# EAGLE board TickBoard (EAGLE 9.5.2)
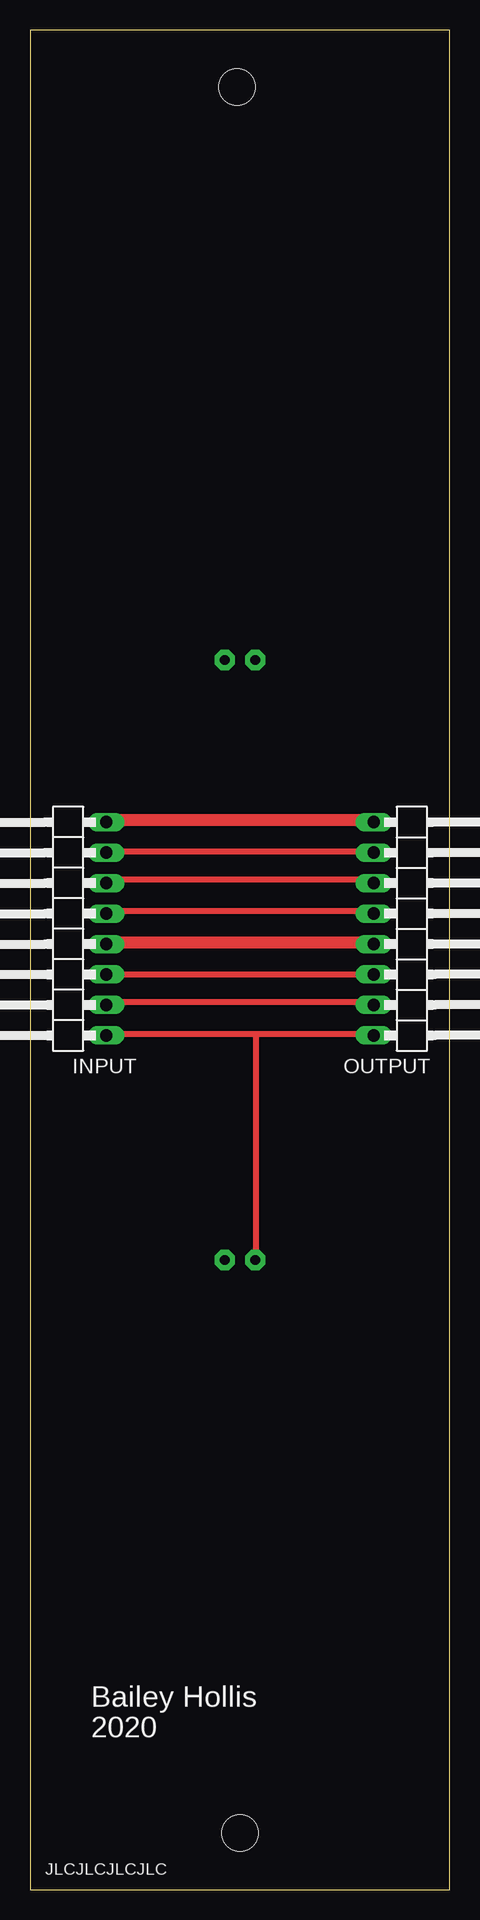
[diagram p0: board, top side]
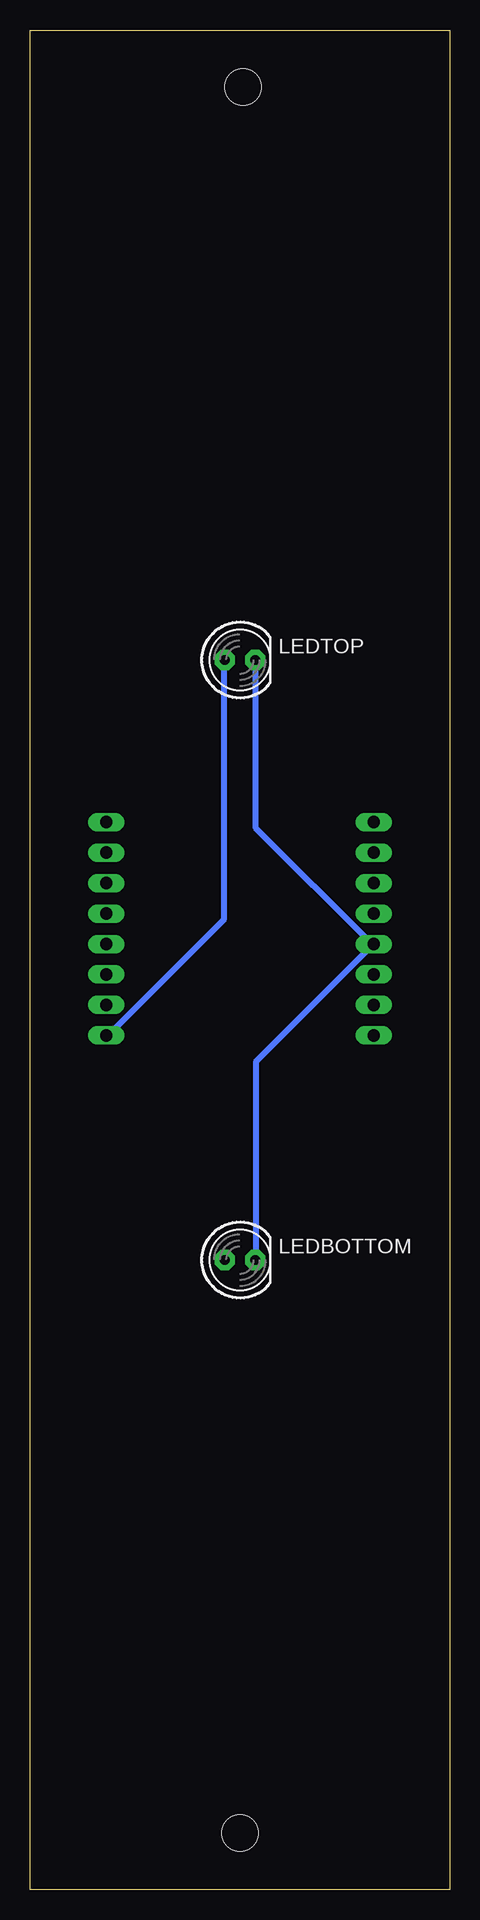
[diagram p1: board, bottom side, seen from below]

Size 35 x 155 mm. Coordinates in mm from the lower left corner, seen from the top.
Outline: 0,0 35,0 35,155 0,155 0,0
Copper layers (1*16): Top 0.035mm / dielectric 1.5mm / Bottom 0.035mm
Design rules "default *": minimum track width 20mil, minimum drill 0.35mm, track to track 6mil, track to pad 6mil, pad to pad 6mil, via to via 6mil, smd to smd 6mil, copper to edge 40mil, drill to drill 6mil, minimum pad ring 10mil, minimum via ring 8mil, stop-mask expansion 4mil, vias tented up to drill 0mil, thermal gap 10mil
Holes 3 mm at 17.5,4.75 17.25,150.25

## Footprints (pad centres in the part's own frame; a part is rotated, then mirrored left to right if it is on the bottom)
1X08/90 = drill 1.016 long: 1 -8.89,-3.81; 2 -6.35,-3.81; 3 -3.81,-3.81; 4 -1.27,-3.81; 5 1.27,-3.81; 6 3.81,-3.81; 7 6.35,-3.81; 8 8.89,-3.81
LED5MM = drill 0.813 pad 1.676 octagon: A -1.27,0; K 1.27,0

## Placement (x,y rotation side)
INPUT  [1X08/90]  2.54,80.1 90 top
LEDBOTTOM  [LED5MM]  17.5,52.5 0 bottom
LEDTOP  [LED5MM]  17.5,102.5 0 bottom
OUTPUT  [1X08/90]  32.46,80.1 270 top

## Library data of the parts
INPUT OUTPUT = pinhead
LEDBOTTOM LEDTOP = adafruit

## Nets
3.3V: INPUT.8 OUTPUT.1
CLEAR: INPUT.3 OUTPUT.6
CLOCK: INPUT.7 OUTPUT.2
DATA: INPUT.6 OUTPUT.3
ENABLE: INPUT.2 OUTPUT.7
GND: INPUT.4 LEDBOTTOM.K LEDTOP.K OUTPUT.5
LATCH: INPUT.5 OUTPUT.4
TICK: INPUT.1 LEDBOTTOM.A LEDTOP.A OUTPUT.8

## Tracks (layer width: path | path; a pad name or v marks a point on that pad's centre or on a via)
3.3V
  Top 0.508: 6.6,89.15 INPUT.8 | 28.4,89.15 OUTPUT.1
  Top 1.016: 28.4,89.15 6.6,89.15
CLEAR
  Top 0.508: INPUT.3 6.6,76.28 28.4,76.28 OUTPUT.6
CLOCK
  Top 0.508: INPUT.7 6.6,86.51 28.4,86.51 OUTPUT.2
DATA
  Top 0.508: INPUT.6 6.6,84.2 28.4,84.2 OUTPUT.3
ENABLE
  Top 0.508: INPUT.2 6.6,73.97 28.4,73.97 OUTPUT.7
GND
  Top 0.508: 6.6,78.92 INPUT.4 | 28.4,78.92 OUTPUT.5
  Top 1.016: 28.4,78.92 6.6,78.92
  Bottom 0.508: LEDBOTTOM.K 16.18,52.5 16.18,69.01 6.6,78.59 INPUT.4 6.6,78.92 16.18,88.49 16.18,102.36 LEDTOP.K
LATCH
  Top 0.508: INPUT.5 6.6,81.56 28.4,81.56 OUTPUT.4
TICK
  Top 0.508: 18.82,71.32 28.4,71.32 OUTPUT.8 | 18.82,71.32 6.6,71.32 INPUT.1 | 18.82,71.32 18.82,52.5 LEDBOTTOM.A
  Bottom 0.508: LEDTOP.A 18.82,102.36 18.82,80.9 28.4,71.32 OUTPUT.8

## Text on the board
tNames: Bailey Hollis | 2020 | JLCJLCJLCJLC